# EAGLE board MRCS-CMRI-CMRINet-Adapter-Array (EAGLE 7.7.0)
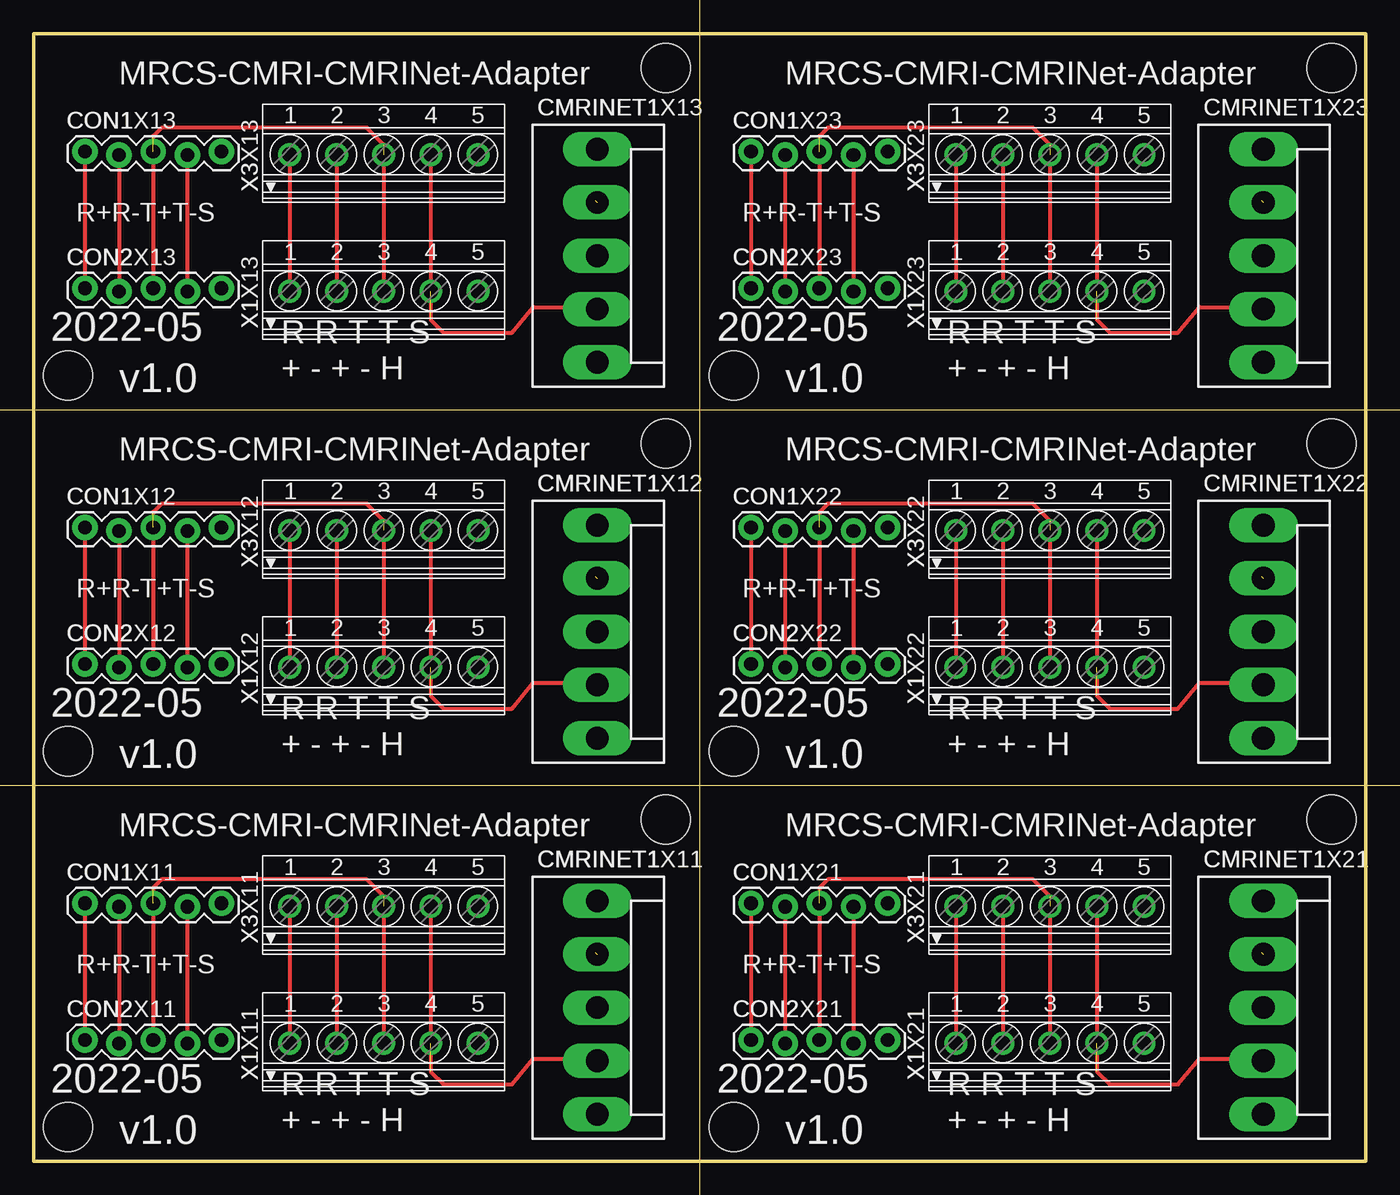
[diagram p0: board, top side]
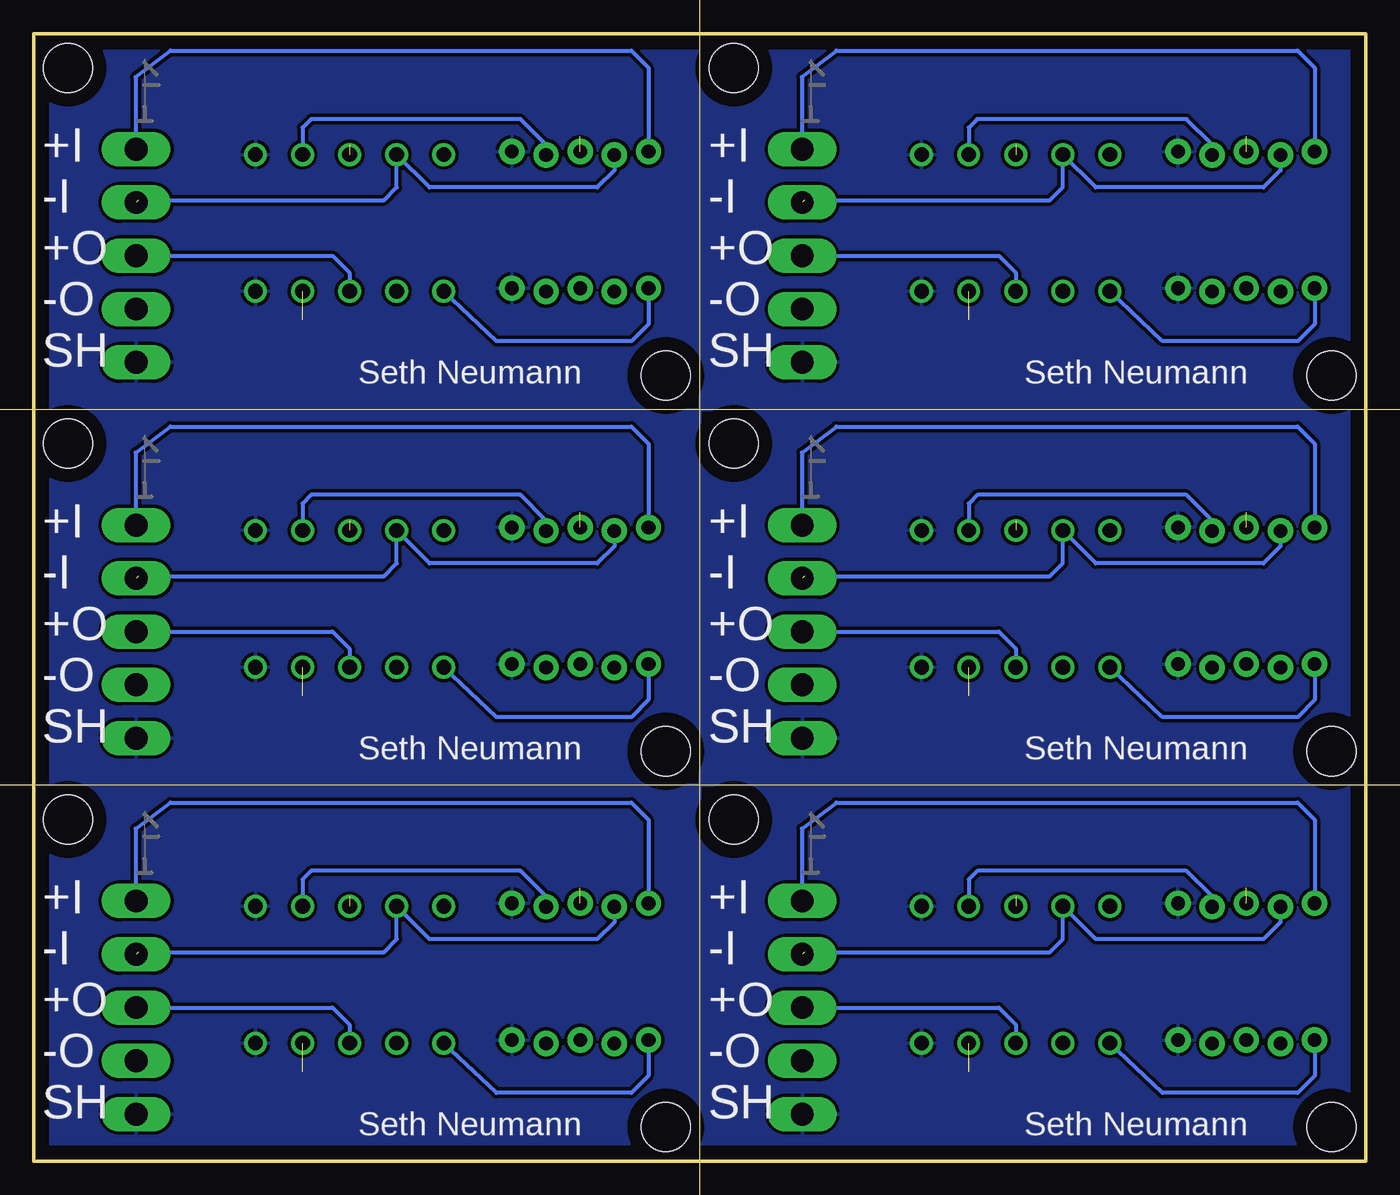
[diagram p1: board, bottom side, seen from below]

Size 99.06 x 83.82 mm. Coordinates in mm from the lower left corner, seen from the top.
Outline: 0,0 99.06,0 99.06,83.82 0,83.82 0,0
Copper layers (1*16): Top 0.035mm / dielectric 1.5mm / Bottom 0.035mm
Design rules "default": minimum track width 10mil, minimum drill 24mil, track to track 8mil, track to pad 8mil, pad to pad 8mil, via to via 8mil, smd to smd 8mil, copper to edge 40mil, drill to drill 8mil, minimum pad ring 10mil, minimum via ring 8mil, stop-mask expansion 4mil, vias tented up to drill 0mil, thermal gap 10mil
Holes 3.66 mm at 46.99,25.4 2.54,2.54 46.99,53.34 2.54,30.48 46.99,81.28 2.54,58.42 96.52,25.4 52.07,2.54 96.52,53.34 52.07,30.48 96.52,81.28 52.07,58.42
Milling: 3 lines

## Footprints (pad centres in the part's own frame; a part is rotated, then mirrored left to right if it is on the bottom)
KK-156-5 = drill 1.7 pad 2.184 long: 1 -7.92,0; 2 -3.96,0; 3 0,0; 4 3.96,0; 5 7.92,0
1X05_LOCK = drill 1.016 pad 1.88: 1 0,0.127; 2 2.54,-0.127; 3 5.08,0.127; 4 7.62,-0.127; 5 10.16,0.127
1751277 = drill 1.1 pad 1.7: 1 -7,-0.1; 2 -3.5,-0.1; 3 0,-0.1; 4 3.5,-0.1; 5 7,-0.1

## Placement (x,y rotation side)
CMRINET1X11  [KK-156-5]  41.91,11.43 270 top
CMRINET1X12  [KK-156-5]  41.91,39.37 270 top
CMRINET1X13  [KK-156-5]  41.91,67.31 270 top
CMRINET1X21  [KK-156-5]  91.44,11.43 270 top
CMRINET1X22  [KK-156-5]  91.44,39.37 270 top
CMRINET1X23  [KK-156-5]  91.44,67.31 270 top
CON1X11  [1X05_LOCK]  3.81,19.05 0 top
CON1X12  [1X05_LOCK]  3.81,46.99 0 top
CON1X13  [1X05_LOCK]  3.81,74.93 0 top
CON1X21  [1X05_LOCK]  53.34,19.05 0 top
CON1X22  [1X05_LOCK]  53.34,46.99 0 top
CON1X23  [1X05_LOCK]  53.34,74.93 0 top
CON2X11  [1X05_LOCK]  3.81,8.89 0 top
CON2X12  [1X05_LOCK]  3.81,36.83 0 top
CON2X13  [1X05_LOCK]  3.81,64.77 0 top
CON2X21  [1X05_LOCK]  53.34,8.89 0 top
CON2X22  [1X05_LOCK]  53.34,36.83 0 top
CON2X23  [1X05_LOCK]  53.34,64.77 0 top
U$1X11  [CA-PROP65WARNING]  27.94,14.61 0 top
U$1X12  [CA-PROP65WARNING]  27.94,42.55 0 top
U$1X13  [CA-PROP65WARNING]  27.94,70.48 0 top
U$1X21  [CA-PROP65WARNING]  77.47,14.61 0 top
U$1X22  [CA-PROP65WARNING]  77.47,42.55 0 top
U$1X23  [CA-PROP65WARNING]  77.47,70.48 0 top
U$2X11  [MRCSLOGOBTM]  34.92,20.95 0 top
U$2X12  [MRCSLOGOBTM]  34.92,48.9 0 top
U$2X13  [MRCSLOGOBTM]  34.92,76.83 0 top
U$2X21  [MRCSLOGOBTM]  84.45,20.95 0 top
U$2X22  [MRCSLOGOBTM]  84.45,48.9 0 top
U$2X23  [MRCSLOGOBTM]  84.45,76.83 0 top
X1X11  1751277  [1751277]  26.04,8.89 0 top
X1X12  1751277  [1751277]  26.04,36.83 0 top
X1X13  1751277  [1751277]  26.04,64.77 0 top
X1X21  1751277  [1751277]  75.56,8.89 0 top
X1X22  1751277  [1751277]  75.56,36.83 0 top
X1X23  1751277  [1751277]  75.56,64.77 0 top
X3X11  1751277  [1751277]  26.04,19.05 0 top
X3X12  1751277  [1751277]  26.04,46.99 0 top
X3X13  1751277  [1751277]  26.04,74.93 0 top
X3X21  1751277  [1751277]  75.56,19.05 0 top
X3X22  1751277  [1751277]  75.56,46.99 0 top
X3X23  1751277  [1751277]  75.56,74.93 0 top

## Library data of the parts
CMRINET1X11-CMRINET1X13 CMRINET1X21-CMRINET1X23 CON1X11-CON1X13 CON1X21-CON1X23 CON2X11-CON2X13 CON2X21-CON2X23 = SPCoast
U$1X11-U$1X13 U$1X21-U$1X23 = MRCS-prop65warningBtm
U$2X11-U$2X13 U$2X21-U$2X23 = MRCSLogoBtm
X1X11-X1X13 X1X21-X1X23 X3X11-X3X13 X3X21-X3X23 = con-phoenix-350

## Nets
R+X11: CMRINET1X11.1 CON1X11.1 CON2X11.1 X1X11.1 X3X11.1
R+X12: CMRINET1X12.1 CON1X12.1 CON2X12.1 X1X12.1 X3X12.1
R+X13: CMRINET1X13.1 CON1X13.1 CON2X13.1 X1X13.1 X3X13.1
R+X21: CMRINET1X21.1 CON1X21.1 CON2X21.1 X1X21.1 X3X21.1
R+X22: CMRINET1X22.1 CON1X22.1 CON2X22.1 X1X22.1 X3X22.1
R+X23: CMRINET1X23.1 CON1X23.1 CON2X23.1 X1X23.1 X3X23.1
R-X11: CMRINET1X11.2 CON1X11.2 CON2X11.2 X1X11.2 X3X11.2
R-X12: CMRINET1X12.2 CON1X12.2 CON2X12.2 X1X12.2 X3X12.2
R-X13: CMRINET1X13.2 CON1X13.2 CON2X13.2 X1X13.2 X3X13.2
R-X21: CMRINET1X21.2 CON1X21.2 CON2X21.2 X1X21.2 X3X21.2
R-X22: CMRINET1X22.2 CON1X22.2 CON2X22.2 X1X22.2 X3X22.2
R-X23: CMRINET1X23.2 CON1X23.2 CON2X23.2 X1X23.2 X3X23.2
SHLDX11: CMRINET1X11.5 CON1X11.5 CON2X11.5 X1X11.5 X3X11.5
SHLDX12: CMRINET1X12.5 CON1X12.5 CON2X12.5 X1X12.5 X3X12.5
SHLDX13: CMRINET1X13.5 CON1X13.5 CON2X13.5 X1X13.5 X3X13.5
SHLDX21: CMRINET1X21.5 CON1X21.5 CON2X21.5 X1X21.5 X3X21.5
SHLDX22: CMRINET1X22.5 CON1X22.5 CON2X22.5 X1X22.5 X3X22.5
SHLDX23: CMRINET1X23.5 CON1X23.5 CON2X23.5 X1X23.5 X3X23.5
T+X11: CMRINET1X11.3 CON1X11.3 CON2X11.3 X1X11.3 X3X11.3
T+X12: CMRINET1X12.3 CON1X12.3 CON2X12.3 X1X12.3 X3X12.3
T+X13: CMRINET1X13.3 CON1X13.3 CON2X13.3 X1X13.3 X3X13.3
T+X21: CMRINET1X21.3 CON1X21.3 CON2X21.3 X1X21.3 X3X21.3
T+X22: CMRINET1X22.3 CON1X22.3 CON2X22.3 X1X22.3 X3X22.3
T+X23: CMRINET1X23.3 CON1X23.3 CON2X23.3 X1X23.3 X3X23.3
T-X11: CMRINET1X11.4 CON1X11.4 CON2X11.4 X1X11.4 X3X11.4
T-X12: CMRINET1X12.4 CON1X12.4 CON2X12.4 X1X12.4 X3X12.4
T-X13: CMRINET1X13.4 CON1X13.4 CON2X13.4 X1X13.4 X3X13.4
T-X21: CMRINET1X21.4 CON1X21.4 CON2X21.4 X1X21.4 X3X21.4
T-X22: CMRINET1X22.4 CON1X22.4 CON2X22.4 X1X22.4 X3X22.4
T-X23: CMRINET1X23.4 CON1X23.4 CON2X23.4 X1X23.4 X3X23.4

## Tracks (layer width: path | path; a pad name or v marks a point on that pad's centre or on a via)
R+X11
  Top 0.305: CON1X11.1 CON2X11.1 | X3X11.1 X1X11.1
  Bottom 0.305: CON1X11.1 3.81,25.4 5.08,26.67 39.37,26.67 41.94,24.73 41.94,19.38 CMRINET1X11.1 | CON2X11.1 3.81,6.35 5.08,5.08 15.12,5.08 X1X11.1
R+X12
  Top 0.305: CON1X12.1 CON2X12.1 | X3X12.1 X1X12.1
  Bottom 0.305: CON1X12.1 3.81,53.34 5.08,54.61 39.37,54.61 41.94,52.67 41.94,47.32 CMRINET1X12.1 | CON2X12.1 3.81,34.29 5.08,33.02 15.12,33.02 X1X12.1
R+X13
  Top 0.305: CON1X13.1 CON2X13.1 | X3X13.1 X1X13.1
  Bottom 0.305: CON1X13.1 3.81,81.28 5.08,82.55 39.37,82.55 41.94,80.61 41.94,75.26 CMRINET1X13.1 | CON2X13.1 3.81,62.23 5.08,60.96 15.12,60.96 X1X13.1
R+X21
  Top 0.305: CON1X21.1 CON2X21.1 | X3X21.1 X1X21.1
  Bottom 0.305: CON1X21.1 53.34,25.4 54.61,26.67 88.9,26.67 91.47,24.73 91.47,19.38 CMRINET1X21.1 | CON2X21.1 53.34,6.35 54.61,5.08 64.66,5.08 X1X21.1
R+X22
  Top 0.305: CON1X22.1 CON2X22.1 | X3X22.1 X1X22.1
  Bottom 0.305: CON1X22.1 53.34,53.34 54.61,54.61 88.9,54.61 91.47,52.67 91.47,47.32 CMRINET1X22.1 | CON2X22.1 53.34,34.29 54.61,33.02 64.66,33.02 X1X22.1
R+X23
  Top 0.305: CON1X23.1 CON2X23.1 | X3X23.1 X1X23.1
  Bottom 0.305: CON1X23.1 53.34,81.28 54.61,82.55 88.9,82.55 91.47,80.61 91.47,75.26 CMRINET1X23.1 | CON2X23.1 53.34,62.23 54.61,60.96 64.66,60.96 X1X23.1
R-X11  (1 unrouted)
  Top 0.305: CON1X11.2 CON2X11.2 | X3X11.2 X1X11.2
  Bottom 0.305: 41.74,15.56 23.49,15.56 22.54,16.51 X3X11.2 20.09,16.51 7.62,16.51 6.35,17.78 CON1X11.2
R-X12  (1 unrouted)
  Top 0.305: CON1X12.2 CON2X12.2 | X3X12.2 X1X12.2
  Bottom 0.305: 41.74,43.5 23.49,43.5 22.54,44.45 X3X12.2 20.09,44.45 7.62,44.45 6.35,45.72 CON1X12.2
R-X13  (1 unrouted)
  Top 0.305: CON1X13.2 CON2X13.2 | X3X13.2 X1X13.2
  Bottom 0.305: 41.74,71.44 23.49,71.44 22.54,72.39 X3X13.2 20.09,72.39 7.62,72.39 6.35,73.66 CON1X13.2
R-X21  (1 unrouted)
  Top 0.305: CON1X21.2 CON2X21.2 | X3X21.2 X1X21.2
  Bottom 0.305: 91.27,15.56 73.02,15.56 72.06,16.51 X3X21.2 69.62,16.51 57.15,16.51 55.88,17.78 CON1X21.2
R-X22  (1 unrouted)
  Top 0.305: CON1X22.2 CON2X22.2 | X3X22.2 X1X22.2
  Bottom 0.305: 91.27,43.5 73.02,43.5 72.06,44.45 X3X22.2 69.62,44.45 57.15,44.45 55.88,45.72 CON1X22.2
R-X23  (1 unrouted)
  Top 0.305: CON1X23.2 CON2X23.2 | X3X23.2 X1X23.2
  Bottom 0.305: 91.27,71.44 73.02,71.44 72.06,72.39 X3X23.2 69.62,72.39 57.15,72.39 55.88,73.66 CON1X23.2
SHLDX11
  pour Bottom (isolate 0.254): 0,0 49.53,0 49.53,27.94 0,27.94
SHLDX12
  pour Bottom (isolate 0.254): 0,27.94 49.53,27.94 49.53,55.88 0,55.88
SHLDX13
  pour Bottom (isolate 0.254): 0,55.88 49.53,55.88 49.53,83.82 0,83.82
SHLDX21
  pour Bottom (isolate 0.254): 49.53,0 99.06,0 99.06,27.94 49.53,27.94
SHLDX22
  pour Bottom (isolate 0.254): 49.53,27.94 99.06,27.94 99.06,55.88 49.53,55.88
SHLDX23
  pour Bottom (isolate 0.254): 49.53,55.88 99.06,55.88 99.06,83.82 49.53,83.82
T+X11  (2 unrouted)
  Top 0.305: CON2X11.3 8.89,20.32 9.53,20.95 24.77,20.95 26.04,19.68 X1X11.3
  Bottom 0.305: CMRINET1X11.3 27.3,11.43 26.04,10.16 X1X11.3
T+X12  (2 unrouted)
  Top 0.305: CON2X12.3 8.89,48.26 9.53,48.9 24.77,48.9 26.04,47.62 X1X12.3
  Bottom 0.305: CMRINET1X12.3 27.3,39.37 26.04,38.1 X1X12.3
T+X13  (2 unrouted)
  Top 0.305: CON2X13.3 8.89,76.2 9.53,76.83 24.77,76.83 26.04,75.56 X1X13.3
  Bottom 0.305: CMRINET1X13.3 27.3,67.31 26.04,66.04 X1X13.3
T+X21  (2 unrouted)
  Top 0.305: CON2X21.3 58.42,20.32 59.05,20.95 74.3,20.95 75.56,19.68 X1X21.3
  Bottom 0.305: CMRINET1X21.3 76.83,11.43 75.56,10.16 X1X21.3
T+X22  (2 unrouted)
  Top 0.305: CON2X22.3 58.42,48.26 59.05,48.9 74.3,48.9 75.56,47.62 X1X22.3
  Bottom 0.305: CMRINET1X22.3 76.83,39.37 75.56,38.1 X1X22.3
T+X23  (2 unrouted)
  Top 0.305: CON2X23.3 58.42,76.2 59.05,76.83 74.3,76.83 75.56,75.56 X1X23.3
  Bottom 0.305: CMRINET1X23.3 76.83,67.31 75.56,66.04 X1X23.3
T-X11  (1 unrouted)
  Top 0.305: CON1X11.4 CON2X11.4 | X3X11.4 29.54,6.66 30.48,5.71 35.56,5.71 37.15,7.62 41.76,7.62 CMRINET1X11.4
  Bottom 0.305: CON1X11.4 11.43,19.68 13.34,21.59 28.89,21.59 29.53,20.95 29.53,18.96 X3X11.4
T-X12  (1 unrouted)
  Top 0.305: CON1X12.4 CON2X12.4 | X3X12.4 29.54,34.6 30.48,33.66 35.56,33.66 37.15,35.56 41.76,35.56 CMRINET1X12.4
  Bottom 0.305: CON1X12.4 11.43,47.62 13.34,49.53 28.89,49.53 29.53,48.9 29.53,46.9 X3X12.4
T-X13  (1 unrouted)
  Top 0.305: CON1X13.4 CON2X13.4 | X3X13.4 29.54,62.54 30.48,61.59 35.56,61.59 37.15,63.5 41.76,63.5 CMRINET1X13.4
  Bottom 0.305: CON1X13.4 11.43,75.56 13.34,77.47 28.89,77.47 29.53,76.83 29.53,74.84 X3X13.4
T-X21  (1 unrouted)
  Top 0.305: CON1X21.4 CON2X21.4 | X3X21.4 79.06,6.66 80.01,5.71 85.09,5.71 86.68,7.62 91.29,7.62 CMRINET1X21.4
  Bottom 0.305: CON1X21.4 60.96,19.68 62.87,21.59 78.42,21.59 79.06,20.95 X3X21.4
T-X22  (1 unrouted)
  Top 0.305: CON1X22.4 CON2X22.4 | X3X22.4 79.06,34.6 80.01,33.66 85.09,33.66 86.68,35.56 91.29,35.56 CMRINET1X22.4
  Bottom 0.305: CON1X22.4 60.96,47.62 62.87,49.53 78.42,49.53 79.06,48.9 X3X22.4
T-X23  (1 unrouted)
  Top 0.305: CON1X23.4 CON2X23.4 | X3X23.4 79.06,62.54 80.01,61.59 85.09,61.59 86.68,63.5 91.29,63.5 CMRINET1X23.4
  Bottom 0.305: CON1X23.4 60.96,75.56 62.87,77.47 78.42,77.47 79.06,76.83 X3X23.4

## Text on the board
tPlace: MRCS-CMRI-CMRINet-Adapter | MRCS-CMRI-CMRINet-Adapter | R+R-T+T-S | R+R-T+T-S | 2022-05 | 2022-05 | R R T T S / + - + - H | R R T T S / + - + - H | v1.0 | v1.0 | MRCS-CMRI-CMRINet-Adapter | MRCS-CMRI-CMRINet-Adapter | R+R-T+T-S | R+R-T+T-S | 2022-05 | 2022-05 | R R T T S / + - + - H | R R T T S / + - + - H | v1.0 | v1.0 | MRCS-CMRI-CMRINet-Adapter | MRCS-CMRI-CMRINet-Adapter | R+R-T+T-S | R+R-T+T-S | 2022-05 | 2022-05 | R R T T S / + - + - H | R R T T S / + - + - H | v1.0 | v1.0
bPlace: +I / -I / +O / -O / SH | +I / -I / +O / -O / SH | Seth Neumann | Seth Neumann | +I / -I / +O / -O / SH | +I / -I / +O / -O / SH | Seth Neumann | Seth Neumann | +I / -I / +O / -O / SH | +I / -I / +O / -O / SH | Seth Neumann | Seth Neumann
Milling: V-Score | V-Score | V-Score
_tNames: CMRINET1 | CMRINET1 | CMRINET1 | CMRINET1 | CON1 | CON1 | CON1 | CON1 | X3 | X3 | CON2 | CON2 | CON2 | CON2 | X1 | X1 | CMRINET1 | CMRINET1 | CMRINET1 | CMRINET1 | CON1 | CON1 | CON1 | CON1 | X3 | X3 | CON2 | CON2 | CON2 | CON2 | X1 | X1 | CMRINET1 | CMRINET1 | CMRINET1 | CMRINET1 | CON1 | CON1 | CON1 | CON1 | X3 | X3 | CON2 | CON2 | CON2 | CON2 | X1 | X1